# Altium PCB espDownloadBoard.PcbDoc
Units mil, origin at the board's own origin, x right, y up, seen from the top; angles counter-clockwise.
Board outline 1370 x 460 mil, 2 copper layers (Top Layer, Bottom Layer); 23 components, 19 nets, 99 pads, 56 vias.
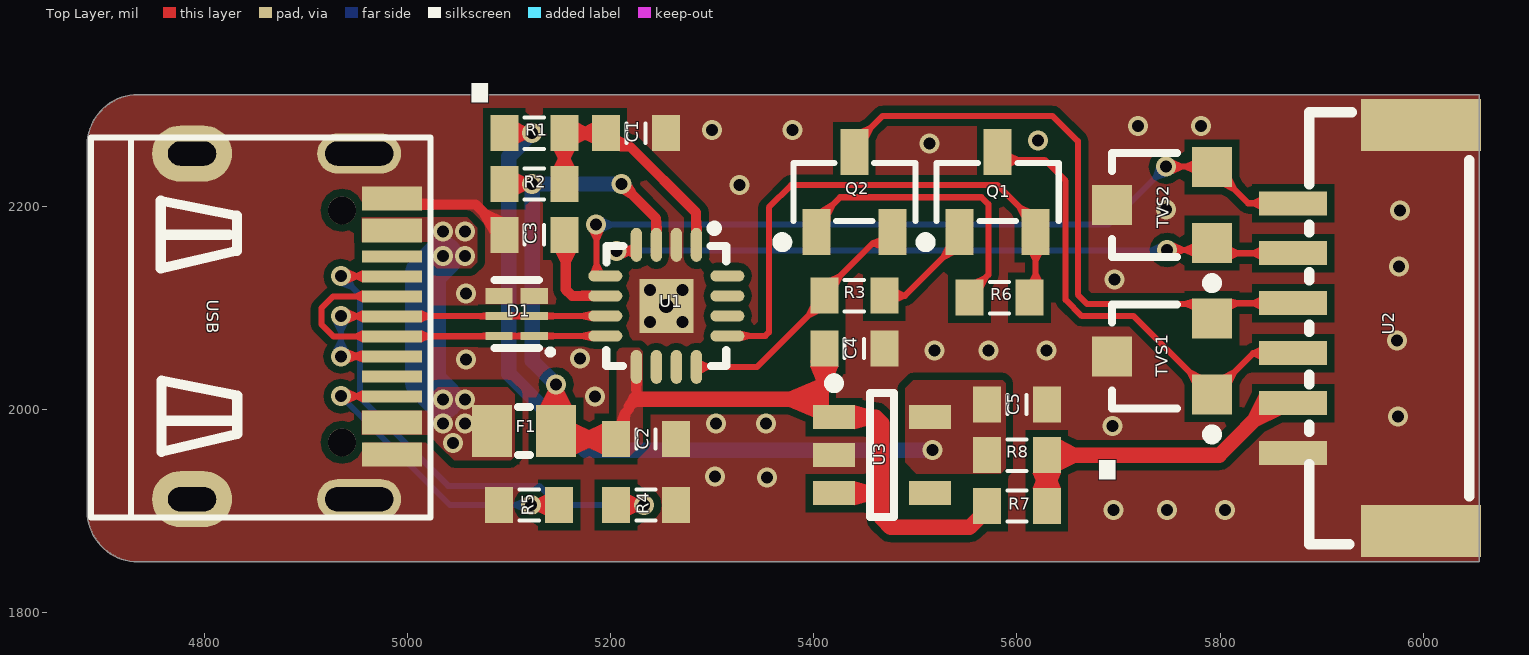
[diagram p0: Top Layer view]
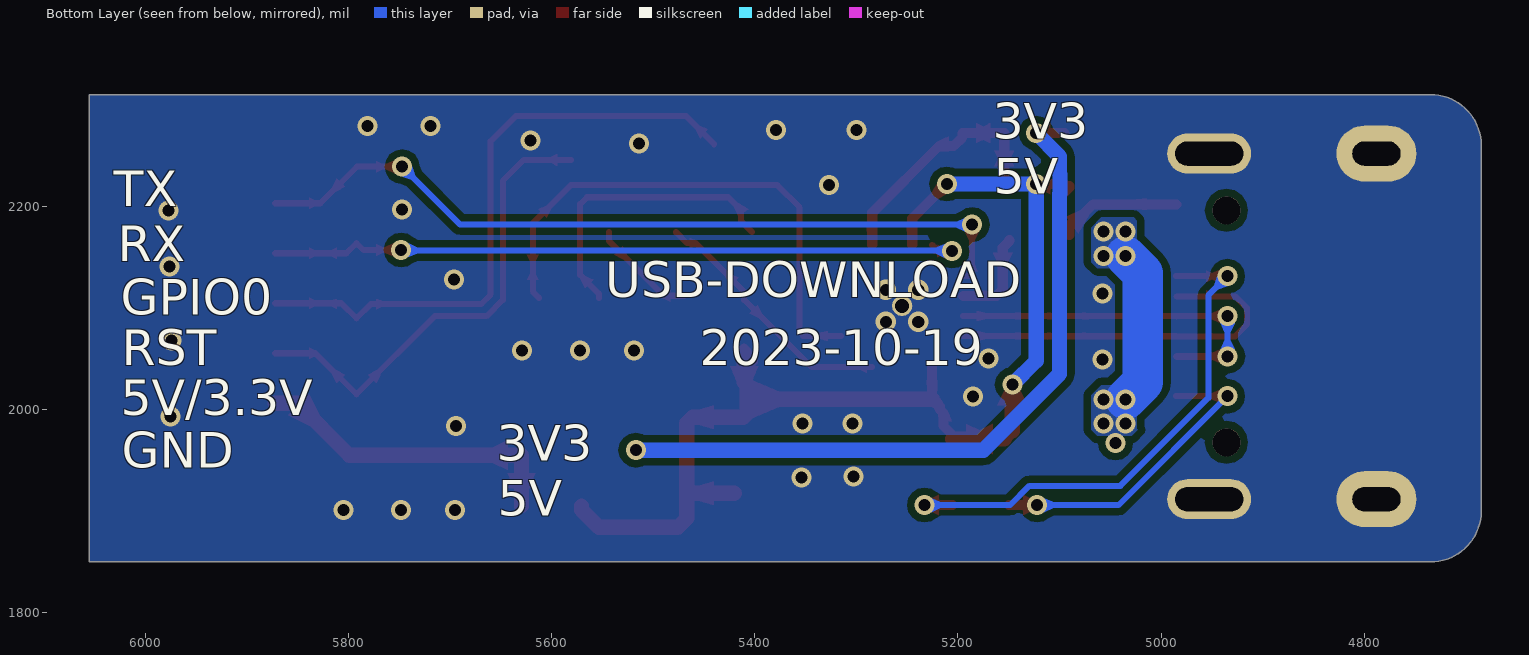
[diagram p1: Bottom Layer view, seen from below]
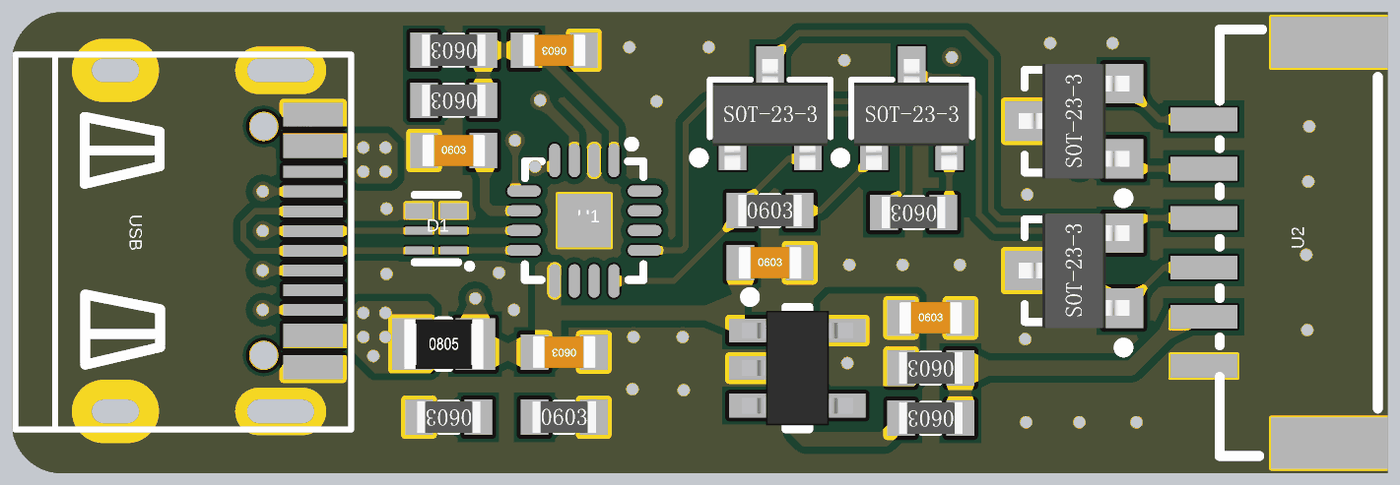
[diagram p2: 3D render of the assembled board from above, using the file's embedded part models]

## Layer stack, top to bottom
Top Solder: solder mask 0.4, Solder Resist, Dk 3.5
Top Layer: signal copper 1.4
Dielectric 1: dielectric 12.6, FR-4, Dk 4.8
Bottom Layer: signal copper 1.4
Bottom Solder: solder mask 0.4, Solder Resist, Dk 3.5

## Board outline
4685,1900 4685,2260 cw(c4735,2260) 4735,2310 6055,2310 6055,1850 6005,1850 4800,1850 4735,1850 cw(c4735,1900)

## Design rules (kind name [scope] priority, off if disabled: settings)
Clearance [All] p1: gap=7 ignorepadtopadclearanceinfootprint=TRUE except(0: Arc-Hole Track-Hole SMDPad-Hole THPad-Hole Via-Hole Fill-Hole Poly-Hole Region-Hole Text-Hole; 6: Arc-Arc Arc-Track Arc-Via Track-Track Track-Via)
PlaneConnect [All] p1: planeconnectstyle=Direct reliefexpansion=20 reliefentries=4 reliefconductorwidth=10 reliefairgap=10
PolygonConnect [All] p1: connectstyle=Direct reliefconductorwidth=10 reliefentries=4 polygonreliefangle="90 Angle" airgapwidth=10
RoomDefinition espDownloadBoard [InComponentClass('espDownloadBoard')] p1: confinementstyle=ConfineOut formatcopy=TRUE lockcomponents=FALSE outline 3395,1063 7895,1063 7895,1633 3395,1633
RoutingVias [All] p1: holewidth=11.81 width=19.68 viastyle="Through Hole" minholewidth=11.81 minwidth=19.68 maxholewidth=-35835.31 maxwidth=34960.63
SolderMaskExpansion [All] p1: expansion=4 istentingtop=FALSE
Width [All] p1: maxlimit=999 minlimit=6 preferedwidth=10
29 further rules are at their usual default settings.

## Components (designator, comment, footprint, x,y, rotation, side; value= is the part's Value field where it differs from the comment)
C1 "1uF" 0603-C 5225,2272 r90 top
C2 "1uF" 0603-C 5235,1971 r90 top
C3 "100nF" 0603-C 5125,2172 r270 top
C4 "1uF" 0603-C 5440,2060 r270 top
C5 "1uF" 0603-C 5600,2005 r270 top
D1 "ESD-USB-2P" SLP2510P8-2P 5107.7,2111.7 r90 top
F1 "5V 1A" 0805-R 5115,1978.87 r270 top
Q1 "SS8050" SOT23-3M 5581,2208 r90 top
Q2 "SS8050" SOT23-3M 5440,2208 r90 top
R1 "0R" 0603-R 5125,2272 r270 top
R2 "NC" 0603-R 5125,2222 r270 top
R3 "10K" 0603-R 5440,2112 r90 top
R4 "5.1K" 0603-R 5235,1906 r90 top
R5 "5.1K" 0603-R 5120,1906 r270 top
R6 "10K" 0603-R 5583,2110 r270 top
R7 "0R" 0603-R 5600,1905 r270 top
R8 "NC" 0603-R 5600,1955 r270 top
TVS1 "ESDA5V3L" ESDA5V3L 5750,2053 r90 top
TVS2 "ESDA5V3L" ESDA5V3L 5750,2202 r90 top
U1 "CH343P" QFN16_3X3 5255,2102 r180 top locked
U2 "GH1.25-6P" CONN-SMD_A1257WR-S-6P 5935,2080 r90 top
U3 "XC6228D332VR-G" XC6228D332VR-G 5467.24,1955 r0 top
USB "Type-c" "Type-c 16pin" 4876.28,2071.84 r270 top locked (schematic designator CN1)

## Footprints (in the part's own frame and the unit in brackets; to place one, negate y for a bottom-side part, rotate by r counter-clockwise, add the part's x,y. Pads: shape width x height; smd on the part's side, far side on the other; paste and mask are expansions set on the pad)
0603-C [mm]
  rect 0.9x0.7 smd: 1(0,0.75) 2(0,-0.75)
  silkscreen extent -0.24,-0.24 0.24,0.24, body extent -0.41,-0.8 0.41,0.8, height 0.84
0603-R [mm]
  rect 0.9x0.7 smd: 1(0,0.75) 2(0,-0.75)
  silkscreen extent -0.39,-0.24 0.39,0.24, body extent -0.4,-0.8 0.4,0.8, height 0.45
0805-R [mm]
  rect 1.3x1 smd: 1(0,0.8) 2(0,-0.8)
  silkscreen extent -0.6,-0.15 0.6,0.15, body extent -0.63,-1 0.62,1, height 0.49
CONN-SMD_A1257WR-S-6P [mm]
  rect 0.6x1.7 smd paste+0 mask+0.051: 1(3.124,1.6) 2(1.875,1.6) 3(0.625,1.6) 4(-0.625,1.6) 5(-1.875,1.6) 6(-3.124,1.6)
  rect 1.3x3 smd paste+0 mask+0.051: 7(5.075,-1.6) 8(-5.075,-1.6)
  silkscreen extent -5.4,-2.8 5.4,1.2
ESDA5V3L [mm]
  rect 1x1 smd: 1(-0.97,-1.067) 2(0.93,-1.067) 3(-0.02,1.433)
  silkscreen extent -2.09,-1.19 1.28,1.43, body extent -1.47,-1.22 1.43,1.58, height 1.2
QFN16_3X3 [mm]
  rect 1.35x1.35 smd mask+0.051: 0(0,0)
  round 0.508 hole 0.356 mask+0.102: 0(0,0)
  oval 0.28x0.85 smd mask+0.051: 1(-0.75,-1.526) 2(-0.25,-1.526) 3(0.25,-1.526) 4(0.75,-1.526) 9(0.75,1.526) 10(0.25,1.526) 11(-0.25,1.526) 12(-0.75,1.526)
  oval 0.85x0.28 smd mask+0.051: 5(1.526,-0.75) 6(1.526,-0.25) 7(1.526,0.25) 8(1.526,0.75) 13(-1.526,0.75) 14(-1.526,0.25) 15(-1.526,-0.25) 16(-1.526,-0.75)
  silkscreen extent -1.5,-2.02 1.5,1.5, body extent -1.52,-1.52 1.52,1.52, height 0.25
SLP2510P8-2P [mil]
  rect 7.9x26.8 smd mask+2: 1(-39.4,-17.3) 2(-19.7,-17.3) 9(-19.7,17.3) 10(-39.4,17.3)
  rect 15.7x26.8 smd mask+2: 3(0,-17.3) 8(0,17.3)
  silkscreen extent -57,-35 16,22
SOT23-3M [mil] "SOT23, 3-Leads, Body 2.9x1.3mm, Pitch 0.95mm, Lead Span 2.4mm, IPC Low Density"
  rect 45x27.56 smd mask+2: 1(-33.35,37.31) 2(-33.35,-37.49) 3(45.39,-0.09)
  silkscreen extent -48,-60 35,76, body extent -55,-57 55,57, height 47
"Type-c 16pin" [mm]
  oval 1.4x2 hole 0.6 slot 1.2 at 90 deg: 0(-4.574,-2.239) 0(4.066,-2.239)
  oval 1x2.1 hole 0.6 slot 1.7 at 90 deg: 0(-4.574,1.941) 0(4.066,1.941)
  rect 0.3x1.5 smd: A1(-3.604,2.761) A4(-2.804,2.761) A5(-1.504,2.761) A6(-0.504,2.761) A7(-0.004,2.761) A8(0.996,2.761) A9(2.296,2.761) A12(3.096,2.761) B1(2.796,2.761) B4(1.996,2.761) B5(1.496,2.761) B6(0.496,2.761) B7(-1.004,2.761) B8(-2.004,2.761) B9(-2.504,2.761) B12(-3.304,2.761)
  round 0.7 hole 0.7: D(-3.154,1.511) D(2.646,1.511)
  silkscreen extent -4.97,-4.77 4.53,3.72
XC6228D332VR-G [mm] "SOT23, 5-Leads, Body 2.9x1.6mm, Pitch 0.95mm, IPC Medium Density"
  rect 1.05x0.6 smd: 1(-1.2,0.95) 2(-1.2,0) 3(-1.2,-0.95) 4(1.2,-0.95) 5(1.2,0.95)
  silkscreen extent -1.32,-1.55 0.3,1.92, body extent -1.4,-1.45 1.4,1.45, height 1.2

## Part data
C1 C2 C3 C4 C5: library part C, "贴片电容", BOM名称=无极性贴片电容, 联系卖家，免费查找封装=唯一出售店铺网址https://shop463601444.taobao.com
D1: "RClamp0522PATCT", Breakdown Voltage (VBR)=6V, Clamping Voltage@Ipp=15V, JLCPCB Part Class="Extended Part", Junction Capacitance(Cj)@1MHz=0.8pF@1MHz, LCSC Part Name=RClamp0524PATCT, Manufacturer=SEMTECH, Operating Temperature=-55℃~+125℃@(Tj), Peak Pulse Power(Ppp)@8/20us=150W, Reverse Stand-Off Voltage (Vrwm)=5V, Add into BOM=yes, Convert to PCB=yes, Datasheet=https://atta.szlcsc.com/upload/public/pdf/source/20150124/1457707260739.pdf, Device=RClamp0524PATCT_C40960, Manufacturer Part=RClamp0524PATCT, Name=RClamp0524PATCT, Supplier=LCSC, Supplier Footprint=SLP2510P8, Supplier Part=C40960, Symbol=RClamp0524PATCT
F1: library part FUSE, "自恢复保险丝"
R1 R2 R3 R4 R5 R6 R7 R8: library part R, "贴片电阻", BOM名称=贴片电阻, 联系卖家，免费查找封装=唯一出售店铺网址https://shop463601444.taobao.com
U1: "USB to high speed enhanced TTL Serial / UART"
U2: "GH1.25-4PWBPZ", BOM_Manufacturer=BOOMELE(博穆精密), BOM_Manufacturer Part=GH1.25-4PWBPZ, BOM_Supplier=LCSC, BOM_Supplier Part=C2829253, Contributor=LCSC, spicePre=U, spiceSymbolName=GH1.25-4PWBPZ
U3: "输出类型：固定 输出极性：正 输出通道数：1 最大输入电压：5.5V 输出电压：3.3V 压差：305mV@(300mA) 输出电流：300mA 电源纹波抑制比(PSRR)：80dB@(1kHz) 3.3V固定输出，Iout=300mA，Vin=5.5V(Max)", BOM_JLCPCB Part Class="Extended Part", BOM_Manufacturer=TOREX, BOM_Manufacturer Part=XC6228D332VR-G, BOM_Supplier=LCSC, BOM_Supplier Part=C69841, spicePre=U, spiceSymbolName=XC6228D332VR-G
USB: "U262-161N-4BVC11"

## Via types
v1: diameter 19.68, hole 11.81, Top Layer to Bottom Layer, tented both sides, 52 vias
v2: diameter 20, hole 12, Top Layer to Bottom Layer, tented both sides, 4 vias

## Nets (pads, with @x,y where several pads share a name; then routed paths per layer and width w, separated by ;. In a path a pad name is that pad's centre, name@x,y a point inside that pad or via, vN(x,y) a via of type N, cw(c..) or ccw(c..) an arc to the next point about the centre after c; other vN are vias at no path point)
CHIP_PU: Q1.3 TVS1.1 U2.4 | length 471.9
  Top Layer w6: Q1.3@5581.09,2245.67 5627.33,2245.67 5648,2225 5648,2108.03 5664.03,2092 5714.82,2092 TVS1.1 5832.6,2055.4 U2.4
DTR: Q2.2 R3.1 U1.12 | length 252.7
  Top Layer w6: U1.12 5344.32,2041.91 5410.47,2108.06 5410.47,2115.94 5458.22,2163.69 5466.71,2163.69 5477.49,2174.47 Q2.2
GND: C1.2 C2.2 C3.2 C4.1 C5.1 D1.3 D1.8 R4.2 R5.2 TVS1.3 TVS2.3 U1.0 U1.2 U2.6 U2.7 U2.8 U3.2 USB.0 USB.A1 USB.A12 USB.B1 USB.B12 | length 123.1
  Top Layer w10: USB.B12 5067.08,2201.92 5084.29,2184.72 5086.69,2184.72 5090.47,2180.94 C3.2@5090.47,2172
  other v1: 5695,1901 5748,1901 5805,1901 5354,1933 5303,1934 5694,1984 5304,1986 5353,1986 5975,1993 5185,2013 5058,2049 5170,2050 5519,2058 5572,2058 5629,2058 5974,2068 5058,2114 5696,2128 5976,2141 5977,2196 5747,2197 5327,2221 5514,2262 5621,2265 5300,2275 5379,2275 5719,2279 5781,2279
  other v2: 5239.05,2086.28 5270.95,2086.28 5239.05,2117.72 5270.95,2117.72
GPIO0: Q2.3 TVS1.2 U2.3 | length 620.7
  Top Layer w6: Q2.3@5440.09,2261.12 5467.97,2289 5635,2289 5660,2264 5660,2113 5669,2104 5777.62,2104 TVS1.2 5806.99,2104.6 U2.3
NetC1_1: C1.1 R1.1 R2.1 U1.1 | length 246.2
  Top Layer w10: R2.1 R1.1 C1.1 5195.47,2268.06 5204.25,2259.28 5218.72,2259.28 5284.33,2193.67 5284.33,2162.28 U1.1
NetC3_1: C3.1 U1.6 | length 93.1
  Top Layer w10: C3.1@5149.53,2167 5149.53,2165.76 5156,2159.28 5156,2118 5162.16,2111.84 U1.6
NetCN1_A5: R4.1 USB.A5 | length 528.6
  Top Layer w6: v1(4934.77,2131.21) USB.A5@4985.16,2131.21
  Top Layer w10: R4.1 v1(5233,1906)
  Bottom Layer w6: v1(4934.77,2131.21) 4953.61,2112.37 4953.61,2011.39 5040.16,1924.84 5129.8,1924.84 5148.65,1906 v1(5233,1906)
NetCN1_B5: R5.1 USB.B5 | length 309.5
  Top Layer w6: v1(4934.77,2013.1) USB.B5@4985.16,2013.1
  Top Layer w10: v1(5122,1906) R5.1
  Bottom Layer w6: v1(4934.77,2013.1) 5041.87,1906 v1(5122,1906)
NetQ1_1: Q1.1 R3.2 | length 105.2
  Top Layer w6: R3.2 5489.75,2112 5543.69,2165.93 Q1.1
NetQ2_1: Q2.1 R6.2 | length 292.4
  Top Layer w6: Q2.1 5413.47,2185.43 5413.47,2196.26 5426.1,2208.89 5565.11,2208.89 5572,2202 5572,2132.46 5553.47,2113.94 R6.2
NetR7_1: R7.1 R8.1 U2.5 | length 313.7
  Top Layer w15: R7.1 R8.1 5799.16,1955 5850.36,2006.2 U2.5
RTS: Q1.2 R6.1 U1.13 | length 528.2
  Top Layer w6: U1.13 5352.35,2072.47 5355.87,2075.99 5355.87,2198.87 5377.89,2220.89 5580.97,2220.89 5618.49,2183.37 5618.49,2115.96 R6.1
U0RXD: TVS2.1 U1.4 U2.2 | length 697.6
  Top Layer w6: v1(5206,2156) 5223.15,2156 5223.15,2159.77 U1.4 ; v1(5748,2157) 5785.2,2157 TVS2.1 5802.02,2153.8 U2.2
  Bottom Layer w6: v1(5206,2156) 5206.5,2156.5 5747.5,2156.5 v1(5748,2157)
U0TXD: TVS2.2 U1.5 U2.1 | length 782.4
  Top Layer w6: v1(5186,2182) 5186.35,2181.65 5186.35,2133.85 5188.67,2131.53 U1.5 ; v1(5747,2239) 5791.62,2239 TVS2.2 5827.62,2203 U2.1
  Bottom Layer w6: v1(5186,2182) 5690,2182 v1(5747,2239)
USB0_D+: D1.2 D1.9 U1.7 USB.A6 USB.B6 | length 350.5
  Top Layer w6: v1(4934.77,2091.84) USB.A6@4985.16,2091.84 ; USB.A6 USB.A6@4985.16,2091.84 ; U1.7 5194.83,2092.08 5125.08,2092.08 D1.2 5124.84,2091.84 USB.A6@4985.16,2091.84
  Top Layer w7: v1(4934.61,2052.31) USB.B6
  Bottom Layer w6: v1@4934.69,2052.39 v1@4934.69,2091.76
  Bottom Layer w8: v1(4934.61,2052.31) v1@4934.69,2052.39 ; v1@4934.69,2091.76 v1(4934.77,2091.84)
USB0_D-: D1.1 D1.10 U1.8 USB.A7 USB.B7 | length 374.9
  Top Layer w6: USB.B7 4926.94,2111.37 4915.43,2099.85 4915.43,2083.83 4927.26,2072 USB.A7 4985.15,2072.15 5124.85,2072.15 D1.1 5125.09,2072.39 5194.83,2072.39 U1.8
VCC-3.3V#1: C5.2 R1.2 R8.2 U3.5 | length 722.4
  Top Layer w10: R1.2 v1(5123,2272)
  Bottom Layer w15: v1(5123,2272) 5100,2249 5100,2232.01 5099.66,2231.67 5099.66,2212.33 5100,2211.99 5100,2035 5175,1960 v1(5517,1960)
VCC-5V#1: C2.1 C4.2 F1.1 R2.2 R7.2 U1.3 U1.9 U3.1 U3.3 | length 1180
  Top Layer w10: R2.2@5090.47,2220 5090.47,2218.78 R2.2@5099.25,2210 ; R2.2 v1(5123,2222) ; F1.1 F1.1@5154.37,1971 ; C2.1 5205.47,1974.94 5214.25,1983.72 5214.25,1996.63 5218,2000.38 5218,2003 5225.47,2010.47 U1.9 ; v1(5211,2222) 5244.96,2188.04 5244.96,2162.28 U1.3 ; C4.2@5401.69,2047.28 5410.47,2056.06 C4.2
  Top Layer w15: F1.1 v1(5146.5,2024.5) ; F1.1@5154.37,1971 C2.1 ; 5225,2010 5393.54,2010 ; C4.2@5410.47,2056.06 5410.47,2026.93 5393.54,2010 ; U3.3 5461.14,1917.6 5467,1923.46 ; R7.2 5570.47,1901.06 5553.41,1884 5475.79,1884 5467,1892.79 5467,1923.46 ; 5393.54,2010 5411.14,1992.4 5461.14,1992.4 5467,1986.54 5467,1923.46
  Bottom Layer w15: v1(5146.5,2024.5) 5123,2047.99 v1(5123,2222) v1(5211,2222)
VIN-USB: F1.2 USB.A4 USB.A9 USB.B4 USB.B9 | length 155.1
  Bottom Layer w40: v1(5035,2010.02) 5018,2027.02 5018,2134 v1(5035,2151)
  other v1: 5045,1967 5035,1986.02 5057,1986.02 5057,2010.02 5057,2151 5035,2175 5057,2175
pads on no net: U1.10 U1.11 U1.14 U1.15 U1.16 U3.4 USB.A8 USB.B8 USB.D

## Polygon pours and split planes (outlines as drawn)
GND on Top Layer "GND_L01_P012" (solid, remove dead copper, pour order 12): 4685,1900 4685,2260 cw(c4735,2260) 4735,2310 6055,2310 6055,1850 6005,1850 4800,1850 4735,1850 cw(c4735,1900)
VIN-USB on Top Layer "VIN-USB_L01_P000" (solid, remove dead copper, pour order 0): 4955,2189 5022,2189 5059,2189 5069,2179 5069,2145 5063,2139 5029,2139 5022,2146 5022,2163 5020,2165 4955,2165
VCC-3.3V#1 on Top Layer "VCC-3.3V#1_L01_P006" (solid, pour order 6): 5490,2021 5498,2029 5586,2029 5589,2026 5589,1942 5584,1937 5501,1937 5490,1948
VCC-5V#1 on Top Layer "VCC-5V#1_L01_P005" (solid, remove dead copper, pour order 5): 5210,2061 5206,2057 5206,1954 5219,1954 5232,1967 5232,2058 5229,2061
VIN-USB on Top Layer "VIN-USB_L01_P003" (solid, pour order 3): 5058,2022.02 5030,2022.02 5022,2014.02 5022,1986.02
VIN-USB on Top Layer "VIN-USB_L01_P002" (solid, remove dead copper, pour order 2): 4955,1999 5021,1999 5044,2022 5099,2022 5106,2015 5106,1954 5102,1950 5046,1950 5034,1962 5021,1975 4955,1975
GND on Bottom Layer "GND_L02_P011" (solid, remove dead copper, pour order 11): 4685,1900 4685,2260 cw(c4735,2260) 4735,2310 6055,2310 6055,1850 6005,1850 4800,1850 4735,1850 cw(c4735,1900)
VIN-USB on Bottom Layer "VIN-USB_L02_P010" (solid, pour order 10): 5059,2024.02 5069,2014.02 5069,1980.02 5063,1974.02 5029,1974.02 5023,1980.02 5024,1981.02 5024,2021.02 5027,2024.02
VIN-USB on Bottom Layer "VIN-USB_L02_P009" (solid, pour order 9): 5059,2189 5069,2179 5069,2145 5063,2139 5029,2139 5023,2145 5024,2146 5024,2186 5027,2189

## Silkscreen, mask and mechanical layers (free items; w line width, h text height)
Top Overlay:
  text "." at 5046,2264 h200
  text "." at 5664,1893 h200
Bottom Overlay:
  text "3V3" at 5166,2254.64 h60
  text "5V" at 5165,2200.64 h60
  text "TX" at 6031,2188 h60
  text "RX" at 6027,2134 h60
  text "USB-DOWNLOAD" at 5547,2098.64 h60
  text "GPIO0" at 6024,2081.64 h60
  text "2023-10-19" at 5454.04,2031.64 h60
  text "RST" at 6023,2031.64 h60
  text "5V/3.3V" at 6024,1982.64 h60
  text "3V3" at 5654,1937.64 h60
  text "GND" at 6023,1930.64 h60
  text "5V" at 5653,1883.64 h60
Mechanical 1:
  lines w8: 4685,1900 ccw(c4735,1900) 4735,1850 4800,1850 6005,1850 6055,1850 6055,1895 6055,2310 4760,2310 4735,2310 ccw(c4735,2260) 4685,2260 4685,2240 4685,1900